# EAGLE board krajBB-Mojžiš_Matej5 (EAGLE 7.7.0)
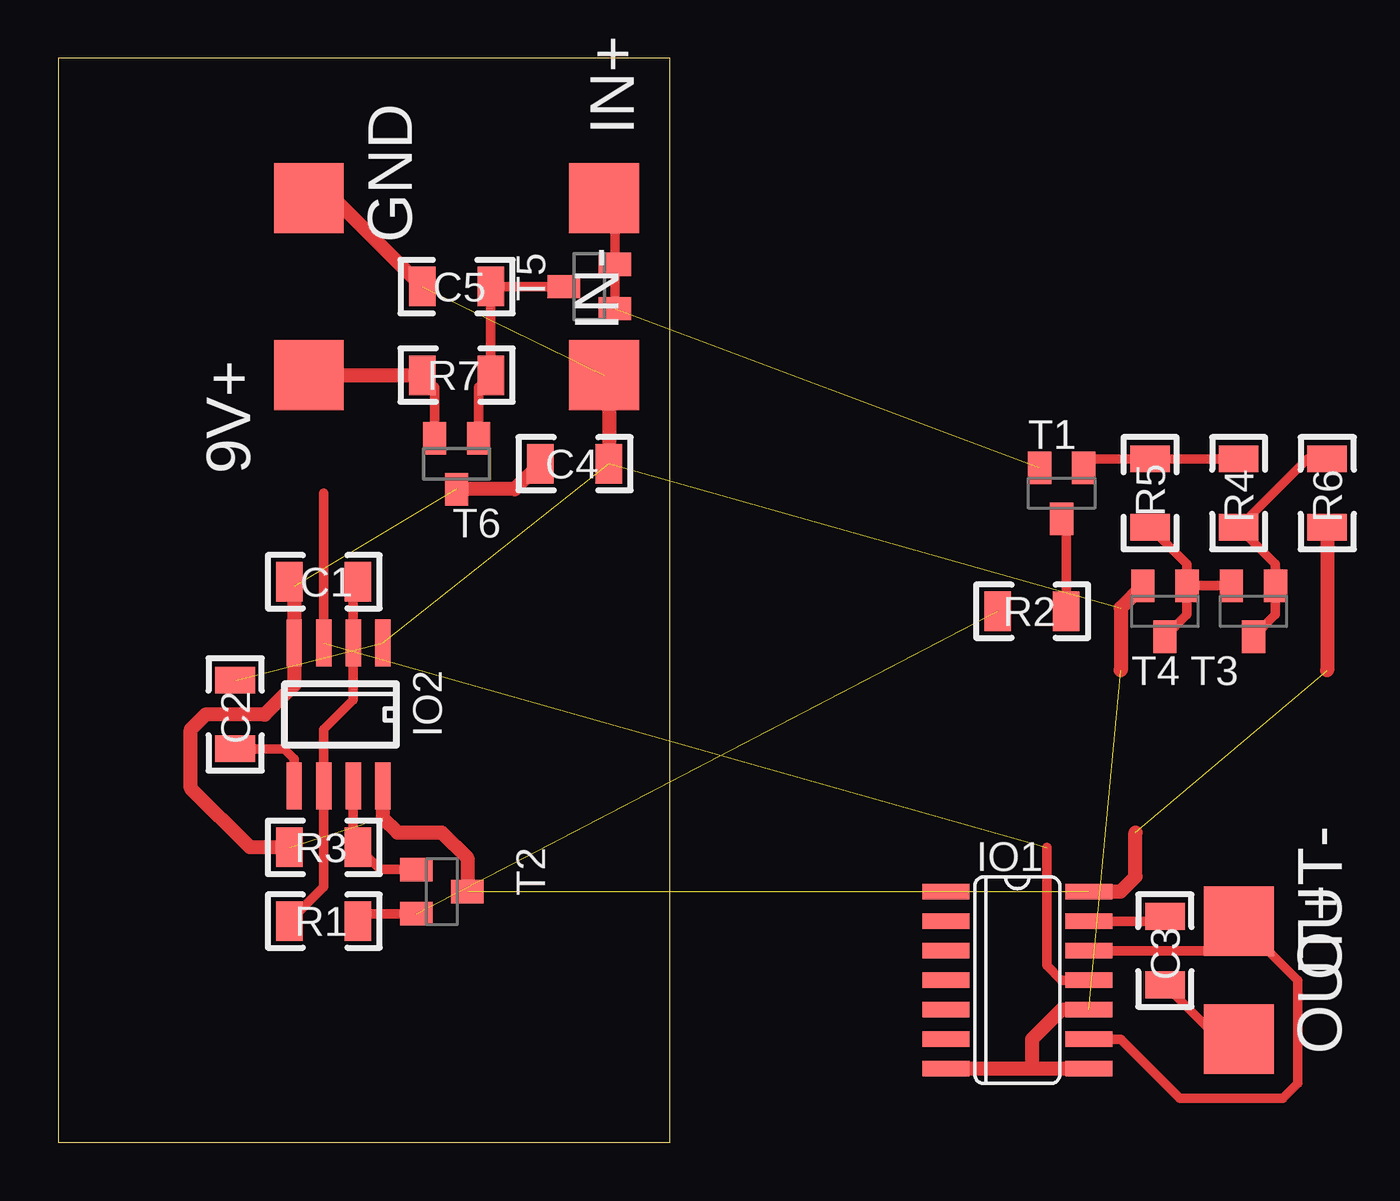
[diagram p0: board, top side]

Size 26.34 x 46.66 mm. Coordinates in mm from the lower left corner, seen from the top.
Outline: 0,0 26.34,0 26.34,46.66 0,46.66 0,0
Copper layers (1*16): Top 0.035mm / dielectric 1.5mm / Bottom 0.035mm
Design rules "default *": minimum track width 10mil, minimum drill 24mil, track to track 8mil, track to pad 8mil, pad to pad 8mil, via to via 8mil, smd to smd 8mil, copper to edge 16mil, drill to drill 8mil, minimum pad ring 10mil, minimum via ring 8mil, stop-mask expansion 4mil, vias tented up to drill 0mil, thermal gap 10mil

## Footprints (pad centres in the part's own frame; a part is rotated, then mirrored left to right if it is on the bottom)
SMD3X3 = smd 3 x 3: P$1 0,0
1206 = smd 1.143 x 1.702: 1 -1.473,0; 2 1.473,0
SO14 = smd 0.66 x 2.032: 1 -3.81,-3.073; 2 -2.54,-3.073; 3 -1.27,-3.073; 4 0,-3.073; 5 1.27,-3.073; 6 2.54,-3.073; 7 3.81,-3.073; 8 3.81,3.073; 9 2.54,3.073; 10 1.27,3.073; 11 0,3.073; 12 -1.27,3.073; 13 -2.54,3.073; 14 -3.81,3.073
SO08 = smd 0.66 x 2.032: 1 -1.905,-3.073; 2 -0.635,-3.073; 3 0.635,-3.073; 4 1.905,-3.073; 5 1.905,3.073; 6 0.635,3.073; 7 -0.635,3.073; 8 -1.905,3.073
LD-DR-3519 = drill 1 pad 1.93 long: P$1 -3,-15; P$2 3,-15
SOT23-BEC = smd 1 x 1.4: B -0.95,-1.1; C 0,1.1; E 0.95,-1.1
SOT23 = smd 1 x 1.4: 1 -0.95,-1.1; 2 0.95,-1.1; 3 0,1.1

## Placement (x,y rotation side)
9V+  SMD3X3  [SMD3X3]  10.79,33.02 270 top
C1  1u  [1206]  11.43,24.13 180 top
C2  1u  [1206]  7.62,18.41 270 top
C3  1u  [1206]  47.62,8.26 270 top  (outside the outline)
C4  1u  [1206]  22.23,29.21 180 top
C5  1u  [1206]  17.14,36.83 0 top
GND  SMD3X3  [SMD3X3]  10.79,40.64 90 top
IN+  SMD3X3  [SMD3X3]  23.5,40.64 270 top
IN-  SMD3X3  [SMD3X3]  23.5,33.02 90 top
IO1  4013D  [SO14]  41.27,6.99 270 top  (outside the outline)
IO2  NE555D  [SO08]  12.06,18.41 180 top
OUT+  SMD3X3  [SMD3X3]  50.8,4.45 90 top  (outside the outline)
OUT-  SMD3X3  [SMD3X3]  50.8,9.53 90 top  (outside the outline)
R1  100  [1206]  11.43,9.53 180 top
R2  470  [1206]  41.91,22.86 180 top  (outside the outline)
R3  10k  [1206]  11.43,12.7 180 top
R4  10k  [1206]  50.8,27.94 270 top  (outside the outline)
R5  2.2k  [1206]  46.99,27.94 90 top  (outside the outline)
R6  47k  [1206]  54.61,27.94 270 top  (outside the outline)
R7  10M  [1206]  17.14,33.02 180 top
REPRODUKTOR  LD-DR-3519  [LD-DR-3519]  76.83,23.5 0 top  (outside the outline)
T1  BC817-25  [SOT23-BEC]  43.18,27.94 180 top  (outside the outline)
T2  BC817-25  [SOT23-BEC]  16.51,10.79 270 top
T3  BC817-25  [SOT23-BEC]  51.44,22.86 180 top  (outside the outline)
T4  BC817-25  [SOT23-BEC]  47.62,22.86 180 top  (outside the outline)
T5  BSS84  [SOT23]  22.86,36.83 90 top
T6  BSS84  [SOT23]  17.14,29.21 180 top
U$1  9VBATTERY  [9VBATTERY]  78.11,22.86 0 top  (outside the outline)

## Library data of the parts
9V+ GND IN+ IN- OUT+ OUT- = solpad
C1-C5 R1-R7 = rcl
IO1 = 40xx
IO2 = linear
REPRODUKTOR = buzzer
T1-T4 = transistor-npn
T5 T6 = transistor-small-signal
U$1 = battery

## Nets
9V_1: R4.2 R6.1 T3.B T3.C
9V_2: R5.1 T3.E T4.B T4.C
+9V: C1.2 C4.2 IO1.14 IO2.4 IO2.8 R3.2 R6.2 T2.C T6.3
CLOCK: IO1.11 IO2.3
CV: C2.2 IO2.5
DIS: IO2.7 R3.1 T2.B
DIS_1: R2.1 T1.C
DIS_IN: R1.1 R2.2 T2.E
DIV: R4.1 R5.2 T1.B
GND: C2.1 C4.1 C5.1 GND.P$1 IN-.P$1 IO1.7 IO1.8 IO1.10 IO2.1 T4.E
IN: IN+.P$1 T1.E T5.1 T5.2
MOS: C5.2 R7.1 T5.3 T6.1
OUT: C3.1 IO1.13
REP: C3.2 OUT+.P$1
REP+: IO1.9 IO1.12 OUT-.P$1
THR: C1.1 IO2.2 IO2.6 R1.2
VIN: 9V+.P$1 R7.2 T6.2

## Tracks (layer width: path | path; a pad name or v marks a point on that pad's centre or on a via)
9V_1
  Top 0.406: T3.C 52.38,22.71 T3.B 52.38,24.88 R4.2 53.75,29.41 R6.1
9V_2
  Top 0.406: R5.1 48.58,24.88 T4.B | T4.C 48.58,22.71 T4.B | T4.B T3.E
+9V  (4 unrouted)
  Top 0.406: T6.3 17.32,27.94
  Top 0.61: C1.2 10.16,23.93 IO2.4 10.16,19.68 8.89,18.41 6.35,18.41 5.71,17.78 5.71,15.24 8.26,12.7 R3.2 | IO2.8 13.97,13.97 14.61,13.34 16.51,13.34 17.61,12.23 T2.C | R6.2 54.61,20.32 | IO1.14 45.72,10.79 46.35,11.43 46.35,13.34 | C4.2 19.65,28.11 T6.3
CLOCK  (1 unrouted)
  Top 0.406: IO2.3 11.43,27.94 | IO1.11 43.18,6.99 42.55,7.62 42.55,12.7
CV
  Top 0.406: IO2.5 10.16,16.51 9.73,16.94 C2.2
DIS
  Top 0.406: T2.B 13.86,11.74 R3.1 12.7,12.9 IO2.7
DIS_1
  Top 0.406: T1.C 43.38,26.64 R2.1
DIS_IN  (1 unrouted)
  Top 0.406: R1.1 13.22,9.85 T2.E
DIV
  Top 0.406: R4.1 R5.2 44.5,29.41 T1.B
GND  (5 unrouted)
  Top 0.61: IO1.8 41.91,3.17 | 41.91,3.17 IO1.7 | IO1.10 43.18,5.71 41.91,4.45 41.91,3.17 | T4.E 45.72,23 45.72,20.32 | 24.33,32.18 IN-.P$1 23.7,32.82 C4.1 | GND.P$1 11.86,40.64 C5.1
IN  (1 unrouted)
  Top 0.406: T5.1 T5.2 23.96,40.17 IN+.P$1
MOS
  Top 0.406: 21.79,36.8 T5.3 C5.2 R7.1 18.09,32.5 T6.1
OUT
  Top 0.406: C3.1 47.42,9.53 IO1.13
REP
  Top 0.406: C3.2 49.96,4.45 OUT+.P$1
REP+
  Top 0.406: IO1.12 49.53,8.26 OUT-.P$1 53.34,6.99 53.34,2.54 52.7,1.91 48.26,1.91 45.72,4.45 IO1.9
THR
  Top 0.406: C1.1 12.7,23.93 IO2.2 12.7,19.05 11.43,17.78 IO2.6 11.43,11 R1.2
VIN
  Top 0.406: R7.2 16.2,32.5 T6.2
  Top 0.61: 9V+.P$1 R7.2